# Altium PCB Mobile_adapter_5V_1A_LQ.PcbDoc
Units mm, origin at the board's own origin, x right, y up, seen from the top; angles counter-clockwise.
Board outline 34.46 x 27.74 mm, 2 copper layers (Top Layer, Bottom Layer); 19 components, 14 nets, 48 pads, 0 vias.
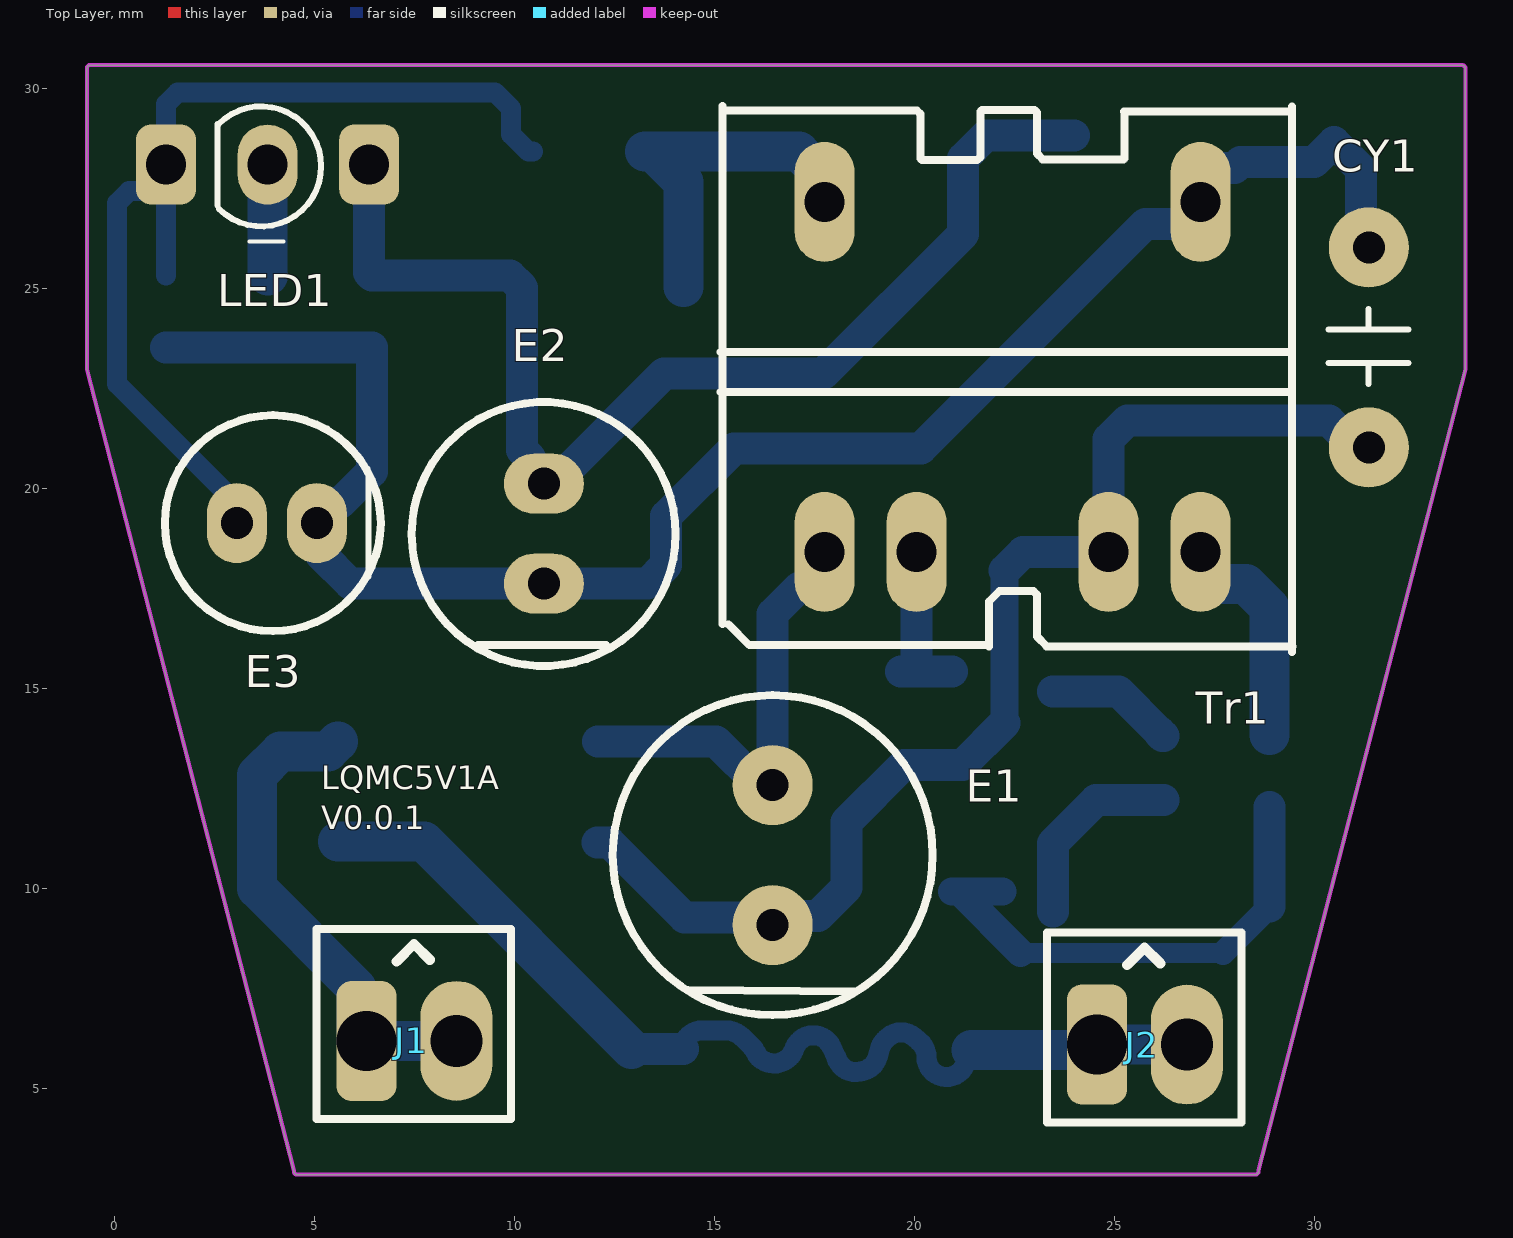
[diagram p0: Top Layer view]
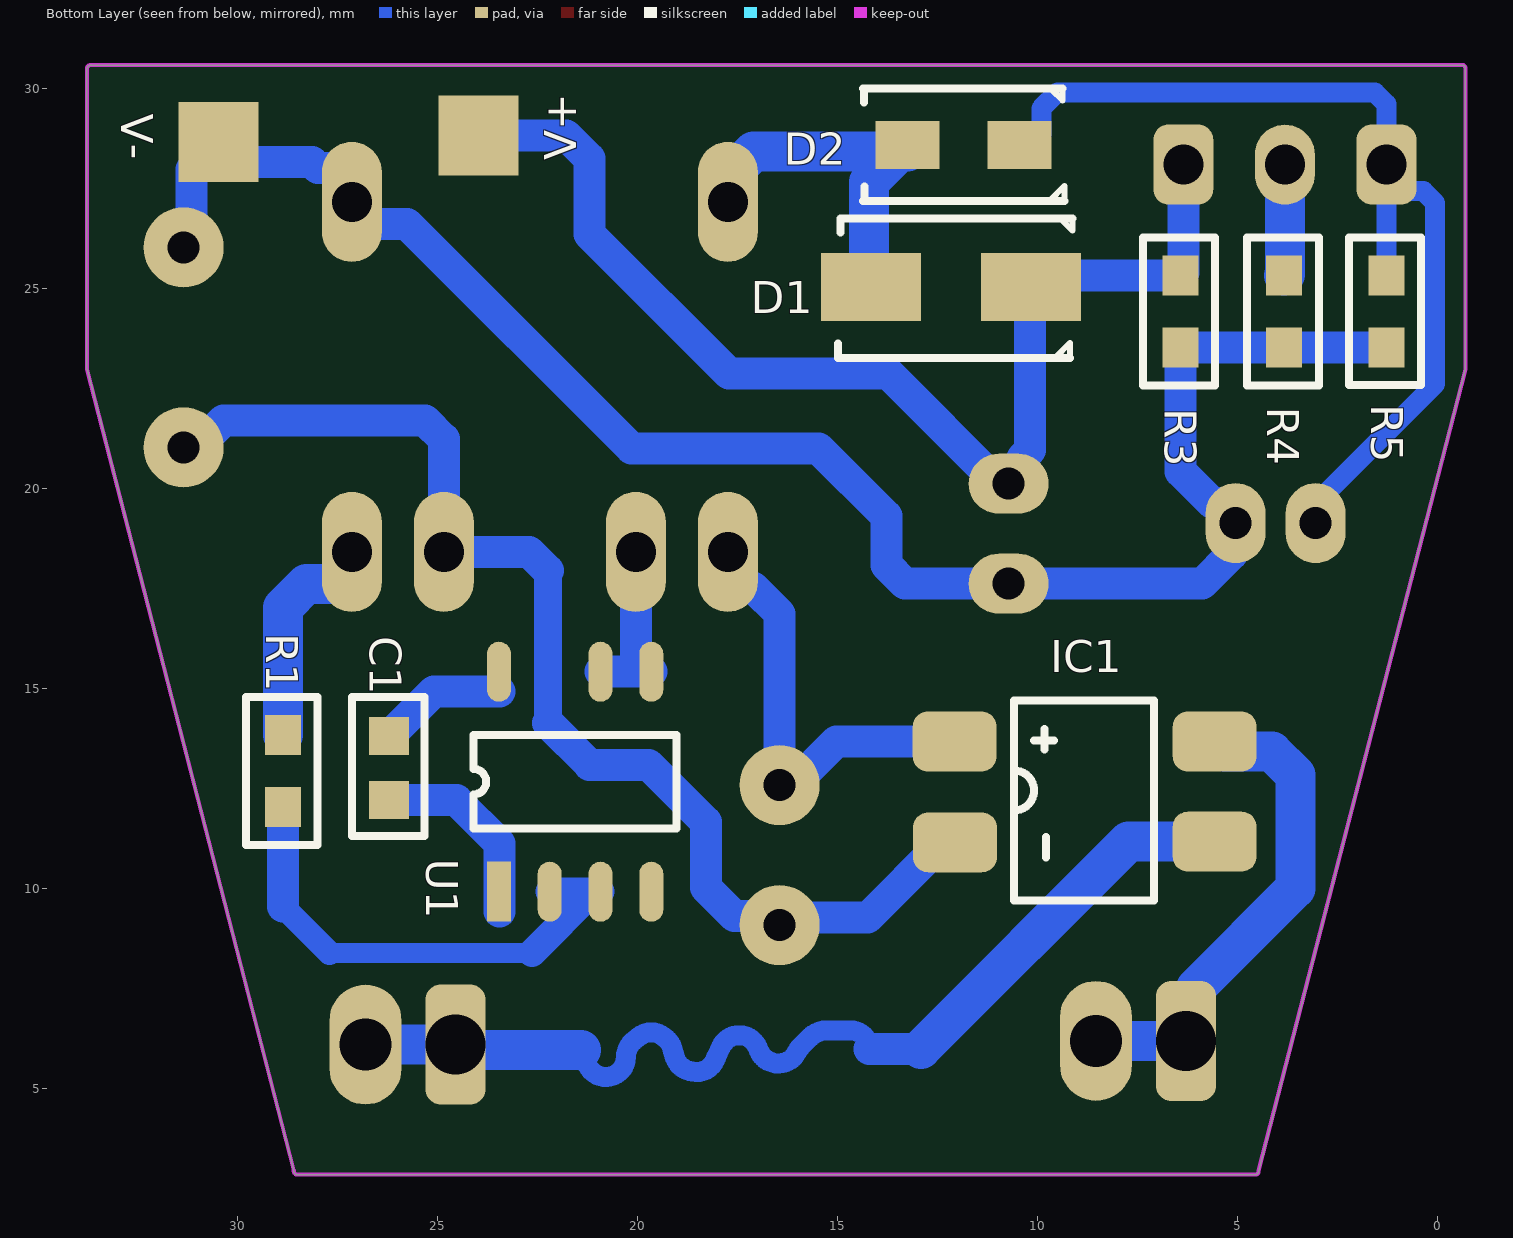
[diagram p1: Bottom Layer view, seen from below]
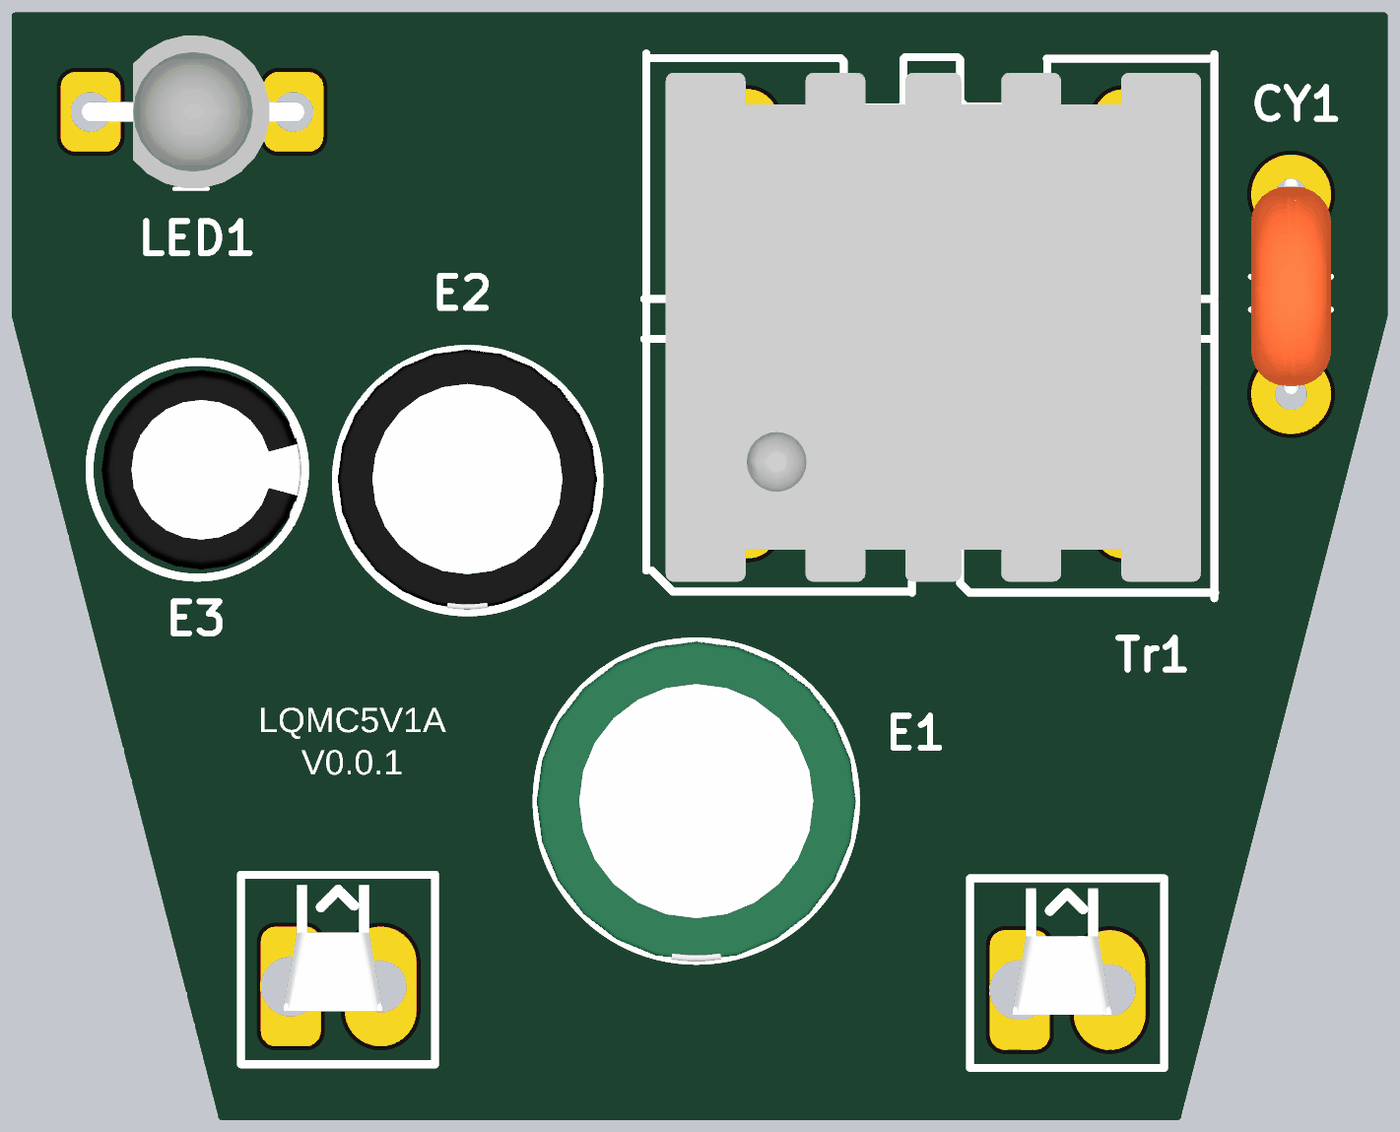
[diagram p2: 3D render of the assembled board from above, using the file's embedded part models]
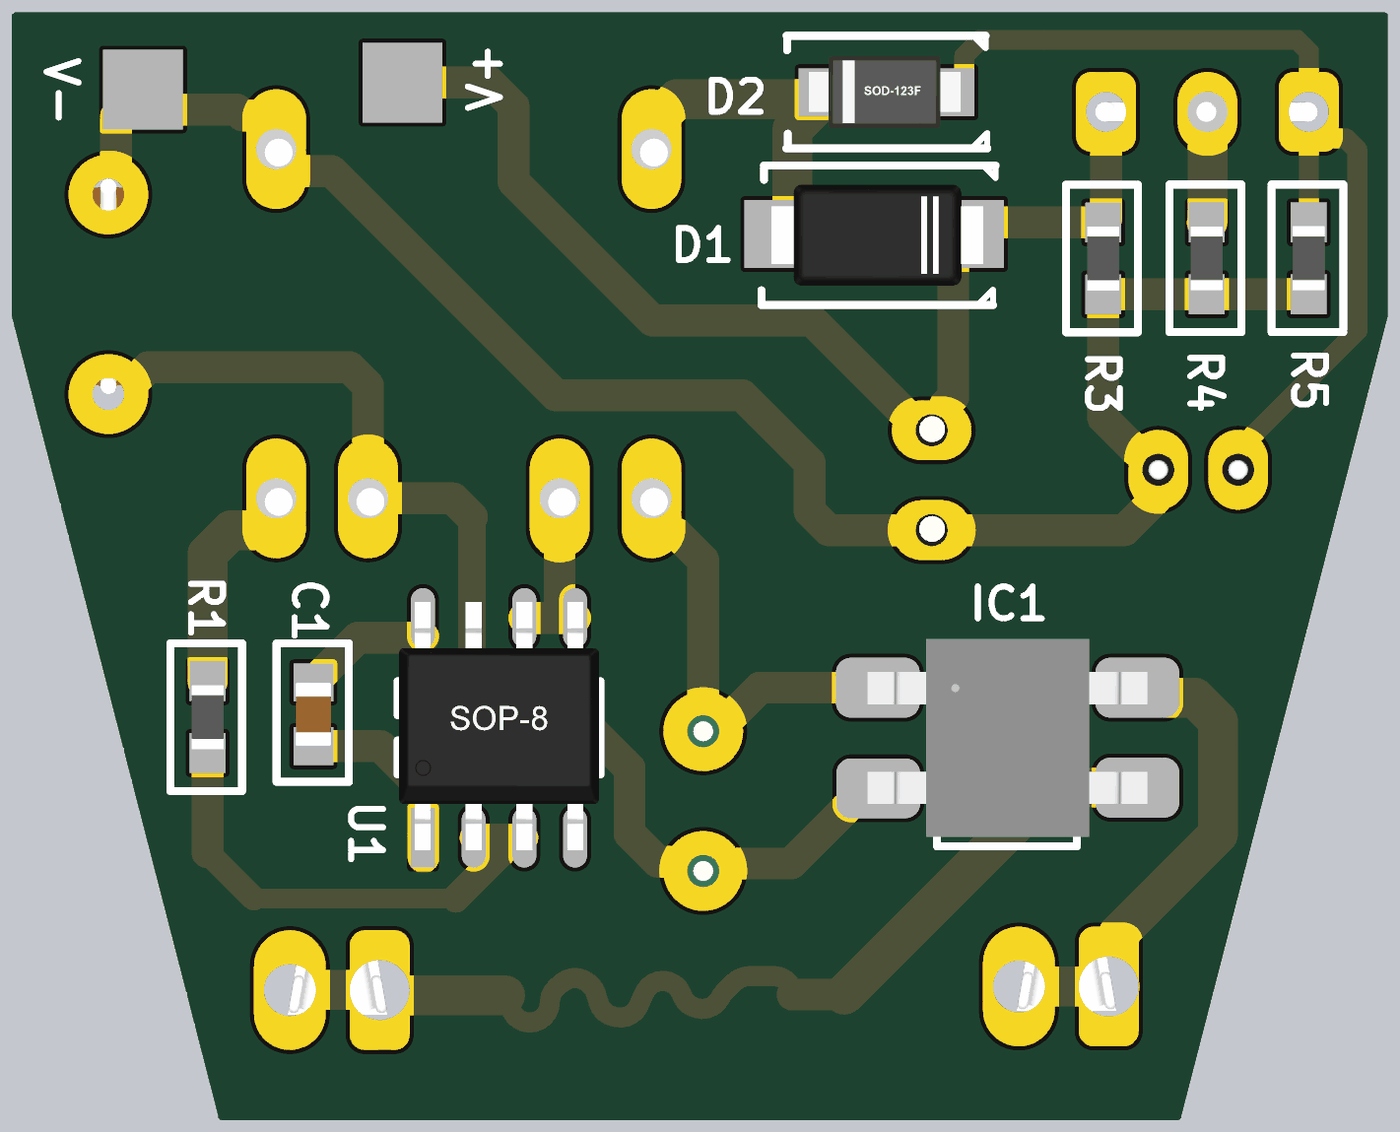
[diagram p3: 3D render of the assembled board from below, using the file's embedded part models]

## Layer stack, top to bottom
Top Solder: solder mask 0.0102, Solder Resist, Dk 3.5
Top Layer: signal copper 0.0356
Dielectric 1: dielectric 0.32, FR-4, Dk 4.8
Bottom Layer: signal copper 0.0356
Bottom Solder: solder mask 0.0102, Solder Resist, Dk 3.5

## Board outline
4.474,2.948 -0.696,22.979 -0.696,30.511 cw(c-0.615,30.511) -0.615,30.592 33.648,30.592 cw(c33.665,30.493) 33.764,30.511 33.764,22.991 33.763,22.98 28.595,2.961 cw(c28.499,2.946) 28.514,2.851 4.554,2.851 cw(c4.563,2.939)

## Design rules (kind name [scope] priority, off if disabled: settings)
Clearance [All] p1: gap=0.254 ignorepadtopadclearanceinfootprint=FALSE except(0: Arc-Hole Track-Hole SMDPad-Hole THPad-Hole Via-Hole Fill-Hole Poly-Hole Region-Hole Text-Hole)
PolygonConnect [All] p1: connectstyle=Relief reliefconductorwidth=0.254 reliefentries=4 polygonreliefangle="90 Angle" airgapwidth=0.254
RoutingVias [All] p1: holewidth=0.711 width=1.27 viastyle="Through Hole" minholewidth=0.711 minwidth=1.27 maxholewidth=0.711 maxwidth=1.27
SolderMaskExpansion [All] p1: expansion=0.102 istentingtop=FALSE
Width [All] p1: maxlimit=2 minlimit=0.1 preferedwidth=0.25 minimp=50.000000 maximp=50.000000 favimp=50.000000
30 further rules are at their usual default settings.

## Components (designator, comment, footprint, x,y, rotation, side; value= is the part's Value field where it differs from the comment)
C1 "10pF" C_0603 26.213,13.014 r90 bottom
CY1 "222" C_TH_104/102 31.348,23.534 r90 top
D1 "SS24F" SMAF 12.163,25.044 r180 bottom
D2 "F7" SOD123F-F7 11.854,28.597 r180 bottom
E1 "6.8uF 400V" CAP_D8XL13 16.447,10.839 r90 top
E2 "680uF" CAP_D6.5XL12 10.725,18.877 r90 top
E3 "10uF" CAP_D5XL11 4.048,19.138 r180 top
IC1 "MB10F" MB10F 8.823,12.42 r0 bottom
J1 "L" "MMT Metal shrapnel connector" 7.415,6.195 r0 top locked
J2 "N" "MMT Metal shrapnel connector" 25.676,6.105 r0 top locked
LED1 "LED 3mm RG Com cathod" LED_RG_3mm 3.817,28.104 r180 top locked
R1 "115K" R_0603 28.862,12.942 r270 bottom
R3 "1K" R_0603 6.426,24.432 r270 bottom
R4 "1K" R_0603 3.833,24.436 r270 bottom
R5 "1K" R_0603 1.279,24.437 r270 bottom
Tr1 "TR_MC_5V1A" T_EE19_5V1A 17.743,18.421 r90 top
U1 "MT2513" SOP8-7 21.562,12.675 r90 bottom
V+ "Vout+" "Wire solder connector _SMD - duplicate" 23.98,28.837 r0 top (schematic designator J3)
V- "Vout-" "Wire solder connector _SMD - duplicate" 30.479,28.662 r0 top (schematic designator J4)

## Footprints (in the part's own frame and the unit in brackets; to place one, negate y for a bottom-side part, rotate by r counter-clockwise, add the part's x,y. Pads: shape width x height; smd on the part's side, far side on the other; paste and mask are expansions set on the pad)
C_0603 [mm]
  rect 0.95x1 smd: 1(-0.8,0) 2(0.8,0)
  silkscreen extent -1.69,-0.89 1.78,0.92, body extent -0.8,-0.45 0.8,0.45, height 0.82
C_TH_104/102 [mm] "TH 104/102 capacitor 5mm Pitch"
  round 2 hole 0.8: 1(-2.5,0) 2(2.5,0)
  silkscreen extent -0.91,-0.99 0.95,1.01, body extent -2.5,-1 2.9,1, height 6
CAP_D5XL11 [mm] "p=2mm"
  oval 1.5x2 hole 0.8: 1(1,0) 2(-1,0)
  silkscreen extent -2.6,-2.7 2.8,2.7, body extent -2.49,-2.5 2.5,2.5, height 11.2
CAP_D6.5XL12 [mm] "p=2.5mm"
  oval 1.5x2 hole 0.8: 1(1.25,0) 2(-1.25,0)
  silkscreen extent -3.31,-3.3 3.29,3.3, body extent -3.24,-3.24 3.28,3.26, height 13.2
CAP_D8XL13 [mm] "p=3.5mm"
  round 2 hole 0.8: 1(1.75,0) 2(-1.75,0)
  silkscreen extent -4,-4 4,4, body extent -4.02,-4 4,4, height 13.3
LED_RG_3mm [mm]
  rrect50% 1.5x2 hole 1: 1(-2.54,0) 3(2.54,0)
  oval 1.5x2 hole 1: 2(0,0)
  silkscreen extent -1.34,-1.45 1.25,1.93, body extent -2.82,-1.92 2.76,1.92, height 10.35
MB10F [mm]
  rrect50% 2.1x1.5 smd: 1(-3.25,1.243) 2(-3.25,-1.26) 3(3.25,-1.26) 4(3.24,1.26)
  silkscreen extent -1.73,-2.29 1.77,2.71, body extent -3.5,-2.48 3.5,2.48, height 1.81
"MMT Metal shrapnel connector" [mm]
  oval 1.8x3 hole 1.3: 1(1.125,0)
  rrect50% 1.5x3 hole 1.5: 2(-1.125,0)
  silkscreen extent -2.37,-1.95 2.49,2.8, body extent -1.32,-0.62 1.18,2.55, height 9.55
R_0603 [mm]
  rect 1x0.9 smd: 1(-0.9,0) 2(0.9,0)
  silkscreen extent -1.85,-0.93 1.85,0.87, body extent -0.8,-0.4 0.8,0.4, height 0.56
SMAF [mm] "SS24F"
  rect 2.5x1.7 smd: 1(-2,0) 2(2,0)
  silkscreen extent -2.83,-1.78 3.04,1.71, body extent -2.57,-1.29 2.73,1.24, height 1
SOD123F-F7 [mm] "F7"
  rect 1.6x1.2 smd: 1(-1.4,0) 2(1.4,0)
  silkscreen extent -2.51,-1.41 2.52,1.41, body extent -1.95,-0.89 1.85,0.91, height 1.02
SOP8-7 [mm] "MT2513"
  rect 1.5x0.6 smd: 1(-2.75,1.905)
  oval 1.5x0.6 smd: 2(-2.75,0.635) 3(-2.75,-0.635) 4(-2.75,-1.905) 5(2.75,-1.905) 6(2.75,-0.635) 7(2.75,1.905)
  silkscreen extent -1.17,-2.54 1.17,2.54, body extent -3.07,-2.5 3.15,2.5, height 1.87
T_EE19_5V1A [mm]
  oval 3x1.5 hole 1: 1(0,0) 2(0,-2.3) 3(0,-7.1) 4(0,-9.4) 5(8.75,-9.4) 6(8.75,0)
  silkscreen extent -2.5,-11.7 11.14,2.6, body extent -2.09,-11.34 10.66,2.06, height 11
"Wire solder connector _SMD - duplicate" [mm]
  rect 2x2 smd far side: 1(0,0)

## Part data
C1: library part C_0603, "25V 10pF C0G ±5% 0603 Multilayer Ceramic Capacitors MLCC - SMD/SMT ROHS", Link=https://lcsc.com/product-detail/Multilayer-Ceramic-Capacitors-MLCC-SMD-SMT_HRE-CGA0603C0G100J250JT_C41361115.html, PN=CGA0603C0G100J250JT
CY1: library part C_TH_104/102, "Keltron 222 1kv Capacitor", Link=https://www.indiamart.com/proddetail/222-1kv-capacitor-27431526388.html?srsltid=AfmBOooTugq0epycLVitZ6jGxnjvQJHEQvSUTzlPssH3imFvuBxUUXmC
D1: library part D_SS24F_SK_SMAF, "40V 550mV@2A 2A SMAF Schottky Diodes ROHS", Link=https://lcsc.com/product-detail/Schottky-Diodes_Guangdong-Hottech-SS24F_C190803.html?s_z=n_SS24F, PN=SS24F
D2: library part D_F7_SOD123, "1.3V@1A 500ns Independent Type 1A 1kV SOD-123F Fast Recovery / High Efficiency Diodes ROHS", Link=https://lcsc.com/product-detail/Fast-Recovery-High-Efficiency-Diodes_HXY-MOSFET-F7_C5199090.html?s_z=n_F7, PN=F7
E1: library part C_D8XL13, "6.8uF 400V ±20% Plugin,D8xL12mm Aluminum Electrolytic Capacitors - Leaded ROHS", Link=https://lcsc.com/product-detail/Aluminum-Electrolytic-Capacitors-Leaded_AISHI-Aihua-Group-EGS2GM6R8F12OT_C112471.html?s_z=n_Capacitors, PN=EGS2GM6R8F12OT
E2: library part C_D6.5XL12, "680uF 6.3V ±20% Plugin,D6.3xL12mm Aluminum Electrolytic Capacitors - Leaded ROHS", Link="680uF 6.3V ±20% Plugin,D6.3xL12mm Aluminum Electrolytic Capacitors - Leaded ROHS", PN=ERR0JM681E12OT
E3: library part C_D5XL11, "10uF 50V ±20% Plugin,D5xL7mm Aluminum Electrolytic Capacitors - Leaded ROHS", Link=https://lcsc.com/product-detail/Aluminum-Electrolytic-Capacitors-Leaded_HRK-50V10uF-CD110_C2960200.html, PN="50V10uF CD110"
IC1: "30A 1.1V@800mA 800mA 1kV MBF Bridge Rectifiers ROHS", Link=https://lcsc.com/product-detail/Bridge-Rectifiers_Guangdong-Hottech-MB10F_C193012.html?s_z=n_MB10F, PN=MB10F
J1 J2: library part "Metal Shrapnel mmt connector", "Metal Shrapnel mmt connector mobile charger", Link=https://mmt2018.en.made-in-china.com/product/rjtmlFMyLiks/China-Mmt-AC-Mobile-Phone-Charger-Metal-Shrapnel-Contact.html
LED1: "Red Green Common Cathode  P=2.54mm", Link=https://www.lcsc.com/datasheet/lcsc_datasheet_2401120947_XINGLIGHT-XL-A324SURSYGW_C2895562.pdf, PN=XL-A324SURSYGW
R1: library part R_0603, "100mW Thin Film Resistor ±50ppm/℃ ±0.1% 115kΩ 0603 Chip Resistor - Surface Mount ROHS", Link=https://lcsc.com/product-detail/Chip-Resistor-Surface-Mount_YAGEO-RT0603BRE07115KL_C861635.html, PN=RT0603BRE07115KL
R3 R4 R5: library part R_0603, "100mW Thick Film Resistors 75V ±100ppm/℃ ±1% 1kΩ 0603 Chip Resistor - Surface Mount ROHS", Link=https://lcsc.com/product-detail/Chip-Resistor-Surface-Mount_UNI-ROYAL-Uniroyal-Elec-0603WAF1001T5E_C21190.html, PN=0603WAF1001T5E
Tr1: library part T_EE19_5V1A
U1: "MT2513 SOP8 Integrated Circuits", Link=https://www.worldwayelec.com/pro/newhaven-display-international/mt2513/4924573/mt2513.pdf?utm_source=chatgpt.com, PN=MT2513
V+ V-: library part "Wire solder connector _SMD"

## Nets (pads, with @x,y where several pads share a name; then routed paths per layer and width w, separated by ;. In a path a pad name is that pad's centre, name@x,y a point inside that pad or via, vN(x,y) a via of type N, cw(c..) or ccw(c..) an arc to the next point about the centre after c; other vN are vias at no path point)
GND: CY1.2 E2.2 E3.2 R3.2 R4.2 R5.2 Tr1.5 V-.1 | length 44.8
  Bottom Layer w0.8: R5.2 R4.2@3.832,23.537 ; E3.2 5.144,19.042 5.144,18.367 5.884,17.627 E2.2 13.311,17.627 13.78,18.096 13.78,19.312 15.476,21.008 20.148,21.008 25.761,26.621 26.912,26.621 27.143,26.852 27.143,27.786 27.374,28.017 27.989,28.017 28.135,28.162 29.979,28.162 V-.1 31.156,27.985 31.156,26.225 CY1.2 ; E3.2@5.433,19.638 5.628,19.638 6.426,20.436 R3.2 6.422,23.536 R4.2 ; R4.2@3.832,23.537 R4.2
IC_C: Tr1.2 U1.5 U1.6 | length 4.1
  Bottom Layer w0.8: U1.5 U1.6 ; 20.043,15.587 Tr1.2
IC_FB: R1.2 U1.2 U1.3 | length 12.6
  Bottom Layer w0.5: 22.643,8.397 27.701,8.397
  Bottom Layer w0.6: 27.701,8.397 28.862,9.558
  Bottom Layer w0.7: U1.3 U1.3@21.115,9.925 ; U1.2 U1.3@21.115,9.925 ; 22.643,8.397 U1.3@21.115,9.925
  Bottom Layer w0.8: 28.862,9.558 R1.2
IN_GND: CY1.1 E1.2 IC1.4 Tr1.3 | length 30.5
  Bottom Layer w0.7: 22.241,14.141 22.241,17.952
  Bottom Layer w0.8: IC1.4 12.363,11.16 14.247,9.275 16.261,9.275 E1.2 16.677,9.319 17.581,9.319 18.293,10.031 18.293,11.665 19.725,13.097 21.197,13.097 22.241,14.141 ; 22.241,17.952 22.71,18.421 Tr1.3 24.843,21.239 25.312,21.708 30.349,21.708 31.023,21.034 CY1.1
NetC1_1: C1.1 U1.1 | length 4.9
  Bottom Layer w0.8: U1.1@23.453,9.437 23.453,11.136 24.531,12.214 C1.1
NetC1_2: C1.2 U1.7 | length 3.2
  Bottom Layer w0.8: U1.7@23.453,14.937 25.089,14.937 26.113,13.914 26.113,13.889 26.188,13.814 C1.2
NetD1_1: D1.1 D2.1 Tr1.6 | length 9.1
  Bottom Layer w1: D2.1@13.254,28.425 D2.1@13.454,28.425 ; D1.1@14.211,25.044 14.211,27.668 D2.1@13.454,28.425 ; Tr1.6 17.743,27.786 17.104,28.425 D2.1@13.454,28.425
NetE1_1: E1.1 IC1.3 Tr1.1 | length 11.4
  Bottom Layer w0.8: IC1.3 15.031,13.68 16.122,12.589 E1.1 16.447,16.872 17.112,17.537 17.42,17.537 17.743,17.86 Tr1.1
NetIC1_1: IC1.1 J2.1 J2.2 | length 26.3
  Bottom Layer w0.5: 14.207,5.993 cw(c14.671,5.993) 14.671,6.457 15.276,6.457 cw(c15.276,5.87) 15.691,6.285 15.919,6.057 ; 15.92,6.056 cw(c15.566,5.703) 16.018,5.917 16.018,5.916 ccw(c16.47,6.131) 16.625,5.656 16.665,5.669 16.666,5.669 ccw(c16.507,6.143) 16.973,5.963 16.994,6.018 ; 16.994,6.019 cw(c17.46,5.837) 17.914,6.047 18.029,5.8 ; 18.029,5.799 cw(c17.575,5.59) 18.048,5.753 cw(c17.575,5.59) 18.052,5.739 18.06,5.722 ccw(c18.52,5.916) 18.629,5.427 18.699,5.443 ; 18.7,5.444 ccw(c18.589,5.931) 19.071,5.796 19.13,6.006 cw(c19.611,5.87) 19.291,6.254 19.338,6.293 cw(c19.658,5.909) 19.976,6.295 20.108,6.186 20.109,6.185 cw(c19.79,5.8) 20.29,5.795 20.29,5.794 ccw(c20.79,5.791) 21.246,5.586 21.309,5.724 21.31,5.726 ccw(c20.853,5.93) 21.315,5.738 21.413,5.973
  Bottom Layer w0.8: 12.914,5.993 14.207,5.993
  Bottom Layer w1: IC1.1 7.73,11.177 12.914,5.993 ; 21.413,5.973 24.419,5.973 ccw(c24.419,6.105) J2.2 J2.1
NetIC1_2: IC1.2 J1.1 J1.2 | length 12.4
  Bottom Layer w1: IC1.2 5.323,13.43 4.142,13.43 3.556,12.845 3.556,10.008 6.04,7.524 6.04,6.445 J1.2 J1.1
NetLED1_2: LED1.2 R4.1 | length 2.8
  Bottom Layer w1: LED1.2 3.817,25.352 R4.1
NetR1_1: R1.1 Tr1.4 | length 5.8
  Bottom Layer w1: Tr1.4 27.143,17.853 27.374,17.622 28.276,17.622 28.862,17.036 R1.1
R_LED: D2.2 E3.1 LED1.3 R5.1 | length 25.2
  Bottom Layer w0.5: LED1.3@1.128,27.814 1.128,27.78 0.787,27.438 0.352,27.438 0.059,27.145 0.059,22.621 3.048,19.632 E3.1 ; R5.1 1.279,27.663 1.279,28.102 LED1.3 1.277,29.615 1.57,29.908 9.507,29.908 9.906,29.509 9.906,28.861 10.342,28.425 D2.2@10.454,28.425
Vout+: D1.2 E2.1 LED1.1 R3.1 V+.1 | length 29
  Bottom Layer w0.8: LED1.1 6.357,25.401 R3.1 9.875,25.332 D1.2 ; D1.2@10.184,25.023 10.184,20.963 E2.1@10.379,20.768 ; E2.1 10.975,20.127 13.726,22.878 17.716,22.878 21.201,26.363 21.201,28.251 21.787,28.837 V+.1
pads on no net: U1.4

## Keep-outs
Keep-Out Layer:
  lines w0.1: 33.763,22.98 28.595,2.961 cw(c28.499,2.946) 28.514,2.851 4.554,2.851 cw(c4.563,2.939) 4.474,2.948 -0.696,22.979 -0.696,30.511 cw(c-0.615,30.511) -0.615,30.592 33.648,30.592 cw(c33.665,30.493) 33.764,30.511 33.764,22.991

## Silkscreen, mask and mechanical layers (free items; w line width, h text height)
Top Overlay:
  text "LQMC5V1A / V0.0.1" at 5.154,11.288 h1